# Altium PCB BLUENRG-345_REV1_PT1_UN.PcbDoc (part 2 of 2)
Units mil, origin at the board's own origin, x right, y up, seen from the top; angles counter-clockwise.
Board outline 1244.08 x 1679.7 mil, 2 copper layers (Top Layer, Bottom Layer), stack 12.598 mil thick; 82 components, 55 nets, 261 pads, 212 vias.
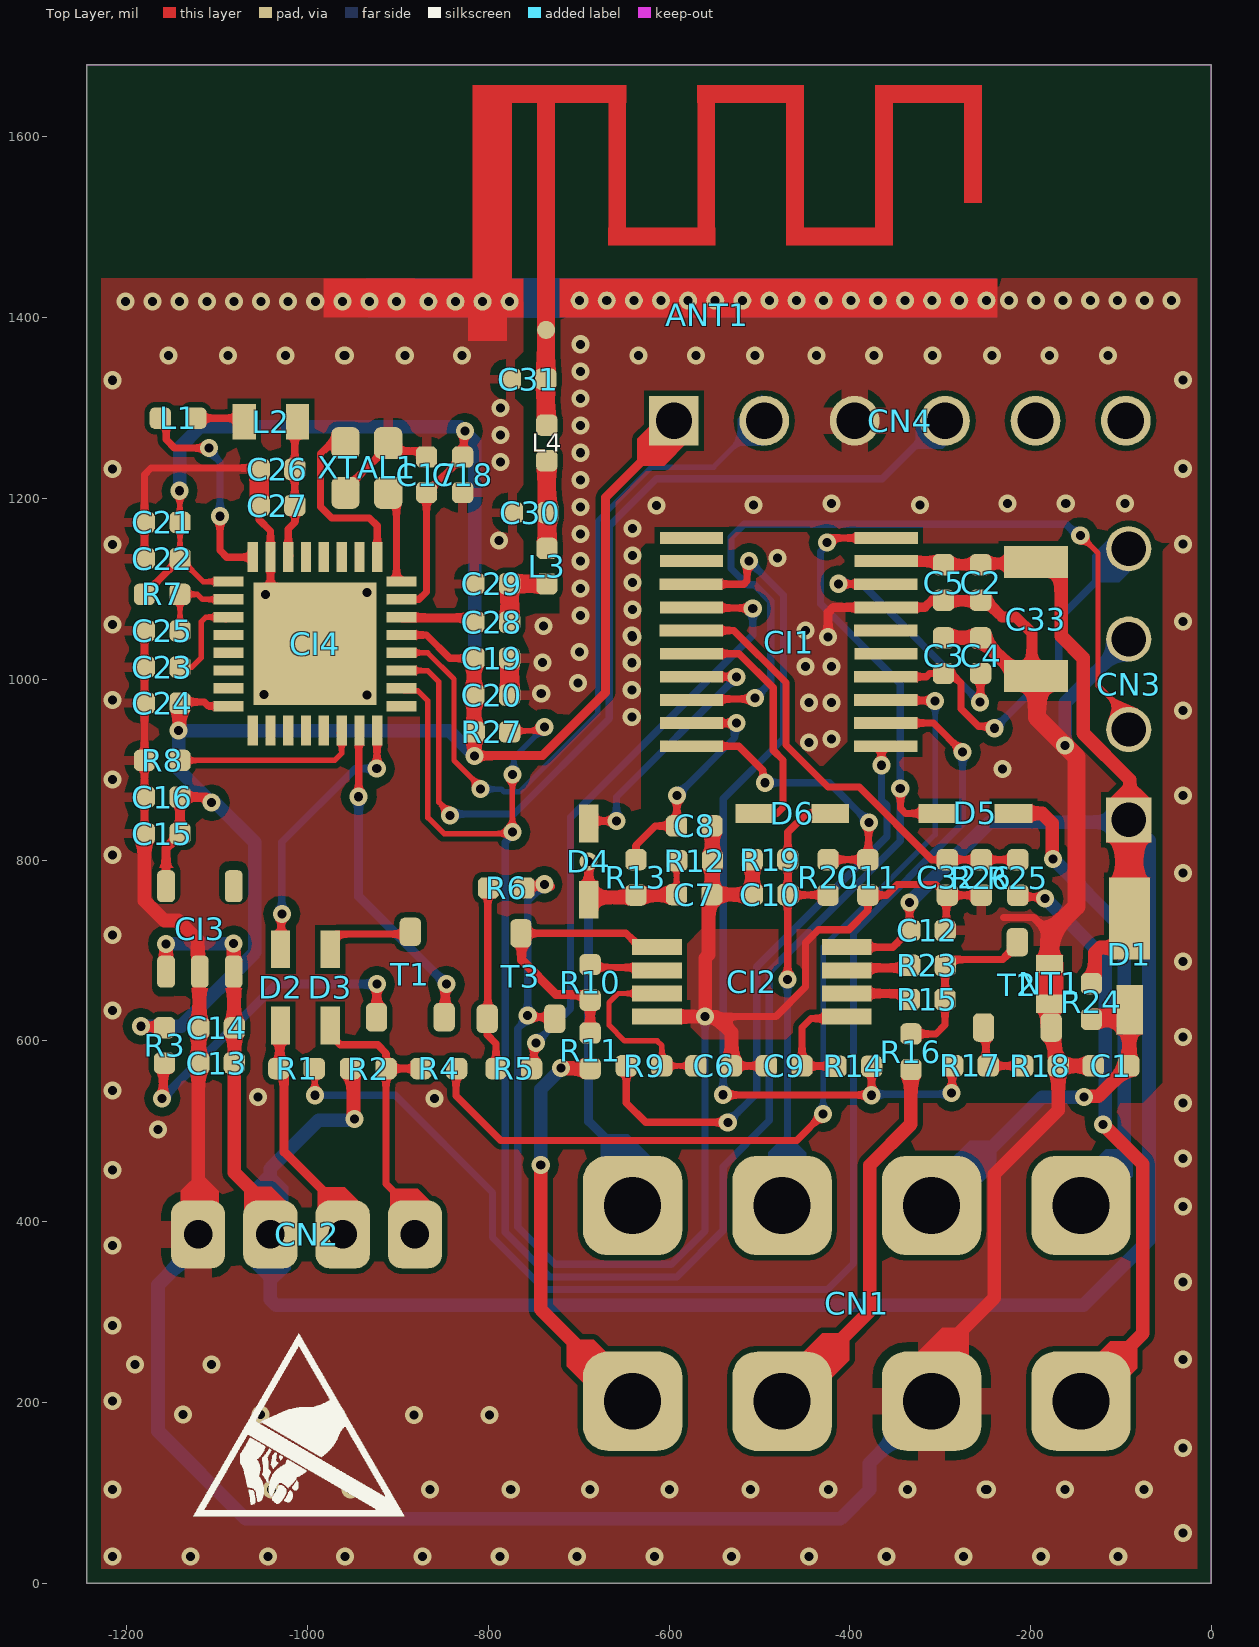
[diagram p0: Top Layer view]

## Silkscreen, mask and mechanical layers (free items; w line width, h text height) (continued)
AssyDrw_Mech25: (continued)
  lines w5: 939.12,-374.2 2177.52,-374.2 ; 939.37,-735.2 939.37,-233.2 ; 939.37,-634.72 2182.37,-634.72 ; 939.37,-531.24 2183.52,-531.24 ; 939.37,-234.2 2183.37,-234.2 ; 956.52,-734.35 2183.52,-734.35 2183.52,2043.8 ; 961.87,2269.01 961.87,2334.01 ; 962.02,1330.22 962.02,1520.01 ; 962.55,1330.22 2184.06,1330.22 ; 962.55,1394.22 2184.06,1394.22 ; 962.55,1458.22 2184.06,1458.22 ; 962.55,2269.22 962.55,1522.22 2183.55,1522.22 ; 963.87,2269.22 1141.55,2269.22 ; 1141.55,1522.22 1141.55,2269.22 ; 1142.02,1331.22 1142.02,1521.01 ; 1423.02,-632.99 1423.02,-531.51 ; 1902.67,-139.2 1298.67,-139.2 1298.89,-17.99 1902.89,-17.99 ; 2010.42,-734.35 -1897.08,-734.35 -1897.08,2399.01 2010.92,2399.01 ; 2184.06,1806.01 2184.02,2399.01 ; 2186.06,2269.22 1141.55,2269.22 ; 961.87,2334.01 961.87,2399.01 2184.02,2399.01 ; 961.87,2334.01 2173.87,2334.01 2184.02,2334.01 2184.02,2399.01 ; 1342.02,-110.99 1451.02,-110.99 1451.02,-44.99 1342.02,-44.99 1342.02,-110.99
  lines w5.91: 1902.67,-139.2 1902.89,-17.99
  text "COMPONENTES NAO MONTADOS" at 1348.61,2354.22 h31.5
  text "COMPONENTE" at 1473.61,2287.22 h31.5
  text "PROD." at 981.16,2285.01 h31.5
  text ".VariantName" at 1081.55,1583.22 h40 r90
  text "Emissão Inicial" at 1162.55,1476.22 h55
  text "Rev. 1" at 985.02,1474.01 h55
  text "COMPONENTES / NAO MONTADOS" at 1514.67,-125.2 h31.5
  text "DIAGRAMA DE MONTAGEM" at 1280.37,-314.2 h31.5
  text "'.VariantName'" at 1260.07,-468.23 h40
  text "Resp.:" at 1455.37,-592.2 h31.5
  text ".DrawnBy" at 1676.02,-591.99 h31.5
  text "Data" at 962.02,-596.99 h31.5
  text ".DATE" at 1087.02,-596.99 h31.5
  text "PCB:" at 968.02,-700.99 h31.5
  text ".Pcb_File_Name_No_Path" at 1123.02,-702.99 h27.56
Mechanical 27:
  lines w5: -1205.08,2.27 -1205.08,1680.87 ; -39.73,2.17 -39.73,1680.87
  lines w7.8: -1242.83,1435.27 -0.08,1435.27 ; -1218.18,1679.31 -1218.18,1623.66 -21.16,1623.66 -21.16,1679.71 ; -1193.58,1623.58 -1193.58,1679.23 ; -45.78,1623.98 -45.78,1679.63
  lines w7.87: -1240.58,512.77 -3.38,512.82 ; -1240.58,545.27 -3.58,545.27

## Text inside footprints (layer, text, board x,y; h text height)
CN1: Mechanical 30 "7" at -169.76,163.63 h120; Mechanical 30 "8" at -169.76,380.15 h120; Mechanical 30 "5" at -335.12,163.63 h120; Mechanical 30 "3" at -500.47,163.61 h120; Mechanical 30 "1" at -665.83,163.63 h120; Mechanical 30 "4" at -500.47,380.15 h120; Mechanical 30 "2" at -665.83,380.15 h120; Mechanical 30 "6" at -335.12,380.15 h120